# EAGLE board board (EAGLE 6.4)
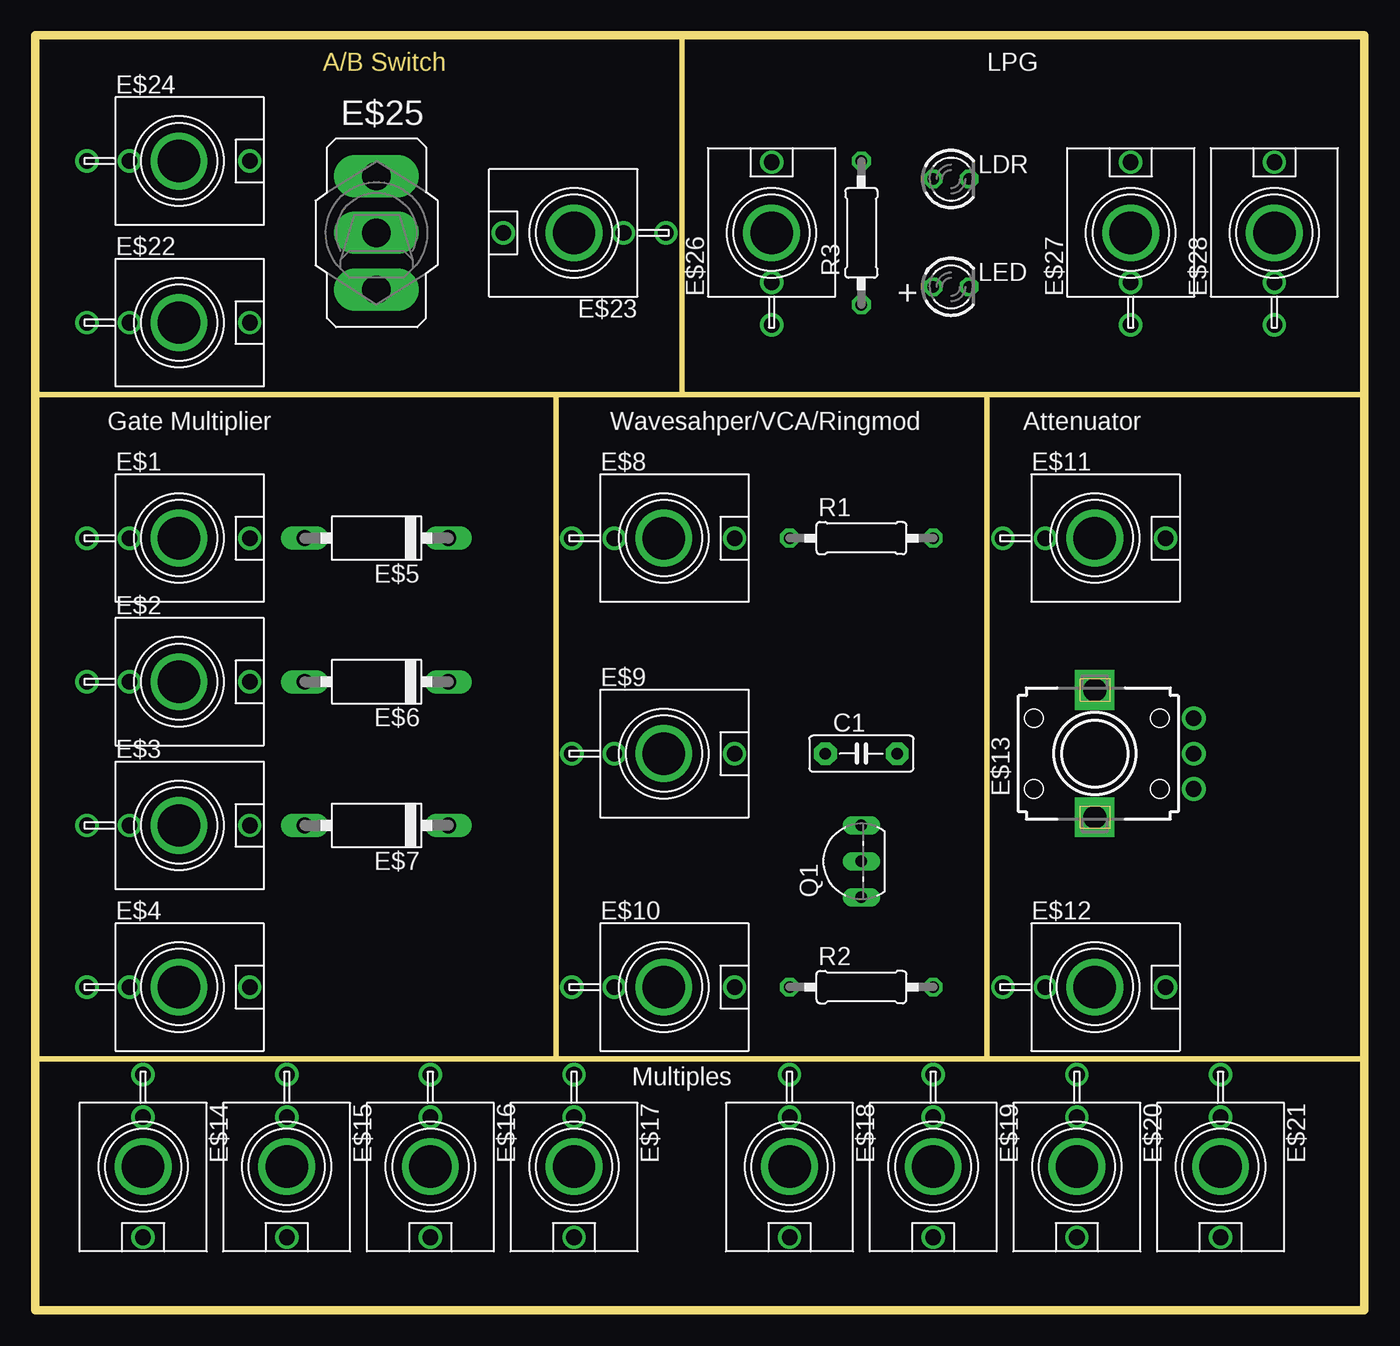
[diagram p0: board, top side]
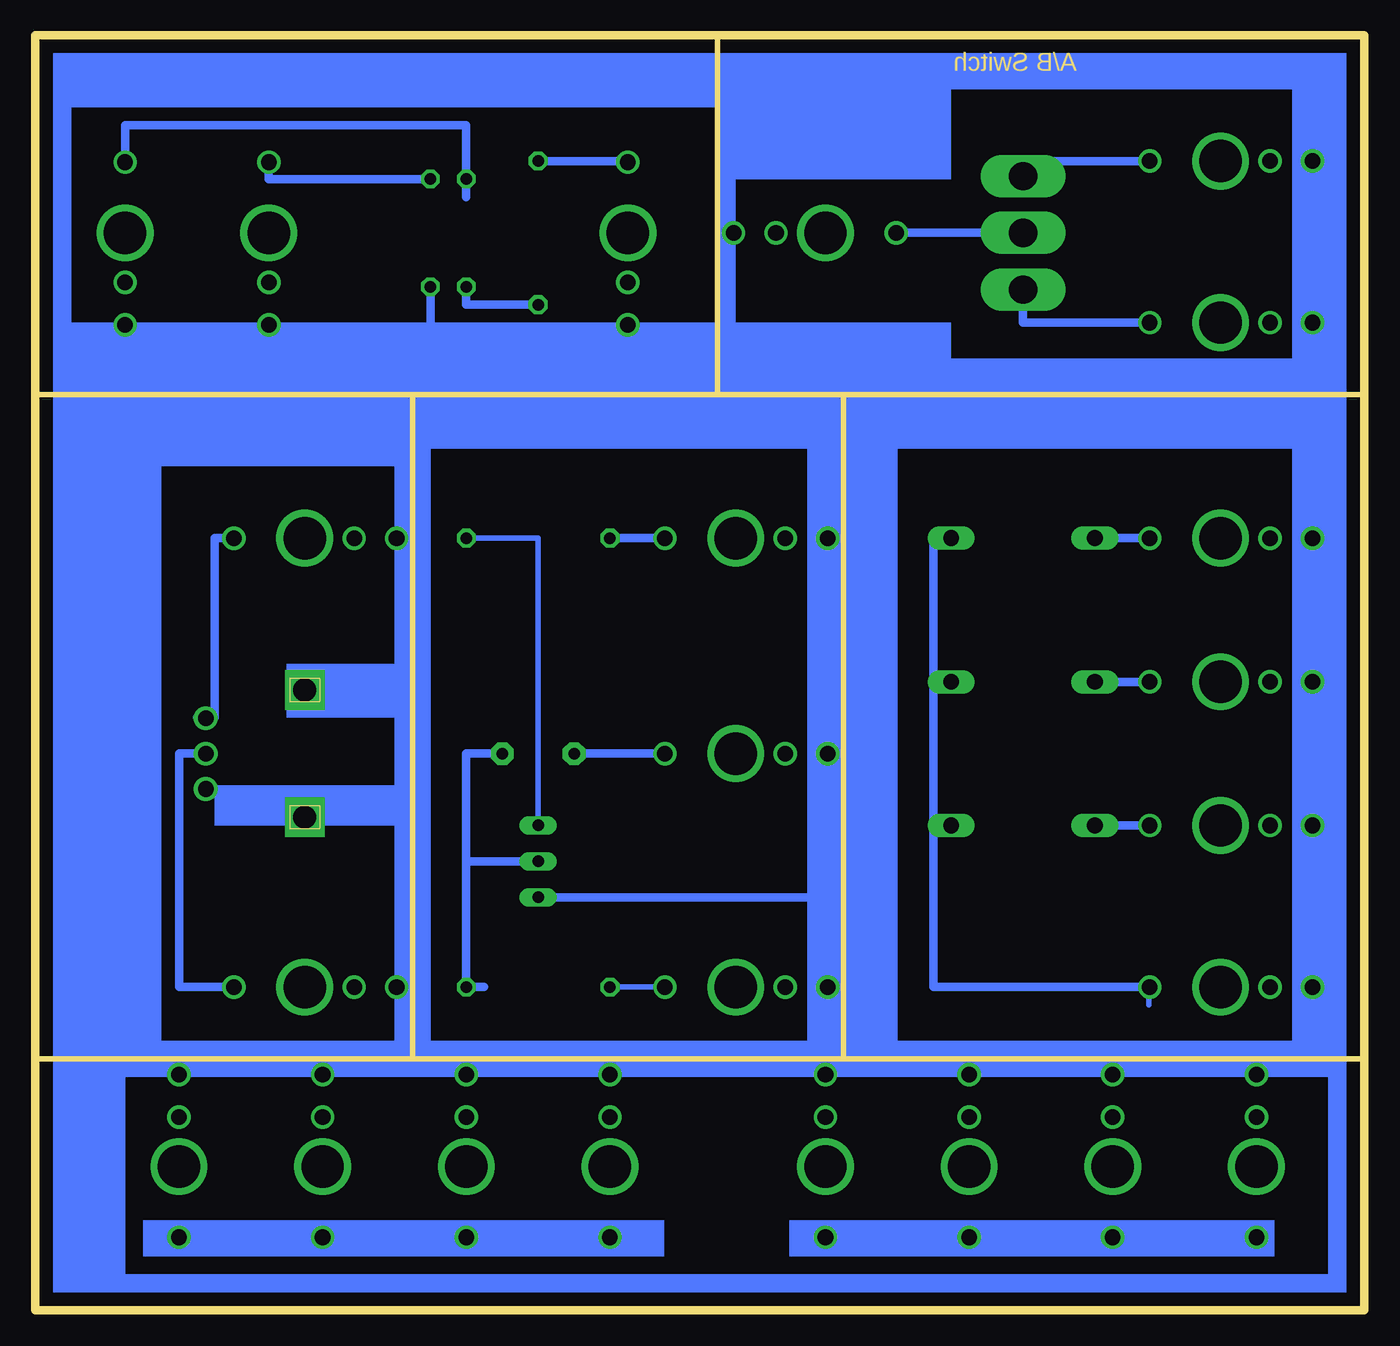
[diagram p1: board, bottom side, seen from below]

Size 93.98 x 90.17 mm. Coordinates in mm from the lower left corner, seen from the top.
Outline: 0,17.78 0,0 93.98,0 93.98,17.78
Outline: 0,17.78 0,64.77
Outline: 0,64.77 0,90.17 45.72,90.17
Outline: 45.72,90.17 93.98,90.17 93.98,64.77
Outline: 93.98,64.77 93.98,17.78
Outline: 0,64.77 36.83,64.77
Outline: 36.83,64.77 45.72,64.77
Outline: 67.31,64.77 45.72,64.77
Outline: 45.72,64.77 45.72,90.17
Outline: 36.83,64.77 36.83,17.78
Outline: 36.83,17.78 0,17.78
Outline: 36.83,17.78 67.31,17.78
Outline: 67.31,17.78 67.31,64.77
Outline: 67.31,64.77 93.98,64.77
Outline: 93.98,17.78 67.31,17.78
Copper layers (1*16): Top 0.035mm / dielectric 1.5mm / Bottom 0.035mm
Design rules "default": minimum track width 10mil, minimum drill 24mil, track to track 8mil, track to pad 8mil, pad to pad 8mil, via to via 8mil, smd to smd 8mil, copper to edge 40mil, drill to drill 8mil, minimum pad ring 10mil, minimum via ring 8mil, stop-mask expansion 4mil, vias tented up to drill 0mil, thermal gap 10mil

## Footprints (pad centres in the part's own frame; a part is rotated, then mirrored left to right if it is on the bottom)
C5B2.5 = drill 0.813 pad 1.6 octagon: 1 -2.54,0; 2 2.54,0
JACK-3.5 = drill 1.1: P$1 0,5; P$2 0,-3.5; P$3 0,-6.5 | drill 3: P$4 0,0
P1-10 = drill 1.118 long: A 5.08,0; C -5.08,0
EVUF = drill 1.1 pad 1.676: 1 -2.5,-7; 2 0,-7; 3 2.5,-7 | drill 1.6 pad 2.8 square: M1 4.5,0; M2 -4.5,0
320-916 = drill 2.007 long: 1 0,4.013; 2 0,0; 3 0,-4.013
LED3MM = drill 0.813 octagon: A -1.27,0; K 1.27,0
TO92-ECB = drill 0.813 long: B 2.54,0; C 0,0; E -2.54,0
0207/10 = drill 0.813 octagon: 1 -5.08,0; 2 5.08,0

## Placement (x,y rotation side)
C1  100nF  [C5B2.5]  58.42,39.37 0 top
E$1  [JACK-3.5]  10.16,54.61 270 top
E$2  [JACK-3.5]  10.16,44.45 270 top
E$3  [JACK-3.5]  10.16,34.29 270 top
E$4  [JACK-3.5]  10.16,22.86 270 top
E$5  [P1-10]  24.13,54.61 180 top
E$6  [P1-10]  24.13,44.45 180 top
E$7  [P1-10]  24.13,34.29 180 top
E$8  [JACK-3.5]  44.45,54.61 270 top
E$9  [JACK-3.5]  44.45,39.37 270 top
E$10  [JACK-3.5]  44.45,22.86 270 top
E$11  [JACK-3.5]  74.93,54.61 270 top
E$12  [JACK-3.5]  74.93,22.86 270 top
E$13  [EVUF]  74.93,39.37 90 top
E$14  [JACK-3.5]  7.62,10.16 180 top
E$15  [JACK-3.5]  17.78,10.16 180 top
E$16  [JACK-3.5]  27.94,10.16 180 top
E$17  [JACK-3.5]  38.1,10.16 180 top
E$18  [JACK-3.5]  53.34,10.16 180 top
E$19  [JACK-3.5]  63.5,10.16 180 top
E$20  [JACK-3.5]  73.66,10.16 180 top
E$21  [JACK-3.5]  83.82,10.16 180 top
E$22  [JACK-3.5]  10.16,69.85 270 top
E$23  [JACK-3.5]  38.1,76.2 90 top
E$24  [JACK-3.5]  10.16,81.28 270 top
E$25  [320-916]  24.13,76.2 0 top
E$26  [JACK-3.5]  52.07,76.2 0 top
E$27  [JACK-3.5]  77.47,76.2 0 top
E$28  [JACK-3.5]  87.63,76.2 0 top
LDR  [LED3MM]  64.77,80.01 0 top
LED  [LED3MM]  64.77,72.39 0 top
Q1  2N5457  [TO92-ECB]  58.42,31.75 90 top
R1  100K  [0207/10]  58.42,54.61 0 top
R2  100R  [0207/10]  58.42,22.86 0 top
R3  100K  [0207/10]  58.42,76.2 90 top

## Library data of the parts
C1 = capacitor-wima
E$1-E$4 E$8-E$12 E$14-E$24 E$26-E$28 = thonkiconn_eagle_v5 (2)
E$5-E$7 = diode
E$13 = pot
E$25 = switch
LDR LED = led
Q1 = transistor
R1-R3 = resistor

## Nets
LED: LED.K
S$1: E$5.A
S$2: E$6.A
S$3: E$7.A
S$6: R1.1
S$7: R2.1
S$8: Q1.B R1.2
S$9: C1.1
S$11: Q1.E
S$12: C1.2 Q1.C R2.2
S$19: R3.2
S$20: LED.A R3.1
S$21: LDR.K

## Tracks (layer width: path | path; a pad name or v marks a point on that pad's centre or on a via)
LED
  Bottom 0.61: LED.K 66.04,67.31
S$1
  Bottom 0.61: 15.24,54.61 E$5.A
S$2
  Bottom 0.406: E$6.A 17.78,44.45
  Bottom 0.61: 15.24,44.45 17.78,44.45
S$3
  Bottom 0.406: E$7.A 17.78,34.29
  Bottom 0.61: 15.24,34.29 17.78,34.29
S$4
  Bottom 0.406: 15.24,22.86 15.24,21.59
  Bottom 0.61: 30.48,54.61 30.48,22.86 15.24,22.86
S$5
  Bottom 0.406: 3.81,62.23 3.81,20.32
S$6
  Bottom 0.61: 49.53,54.61 R1.1
S$7
  Bottom 0.406: R2.1 49.53,22.86
S$8
  Bottom 0.406: R1.2 58.42,54.61 Q1.B
S$9
  Bottom 0.61: 49.53,39.37 C1.1
S$10
  Bottom 0.61: 80.01,54.61 81.28,54.61 81.28,41.91 82.55,41.91
S$11
  Bottom 0.406: 38.1,29.21 35.56,29.21
  Bottom 0.61: Q1.E 38.1,29.21
S$12
  Bottom 0.61: 62.23,22.86 R2.2 63.5,31.75 | C1.2 63.5,39.37 63.5,31.75 | Q1.C 63.5,31.75
S$13
  Bottom 0.61: 82.55,39.37 83.82,39.37 83.82,22.86 80.01,22.86
S$14
  Bottom 0.61: 81.28,36.83 67.31,36.83
S$15
  Bottom 0.61: 73.66,44.45 68.58,44.45
S$16
  Bottom 0.61: 15.24,81.28 24.13,81.28
S$17
  Bottom 0.61: 15.24,69.85 24.13,69.85 24.13,71.12
S$18
  Bottom 0.61: 33.02,76.2 25.4,76.2
S$19
  Bottom 0.61: 52.07,81.28 R3.2
S$20
  Bottom 0.61: R3.1 63.5,71.12 LED.A
S$21
  Bottom 0.61: LDR.K 77.47,80.01 77.47,81.28
S$22
  Bottom 0.61: 87.63,81.28 87.63,83.82 63.5,83.82 63.5,78.74
(copper drawn outside any net)
  shapes: Bottom area x30

## Text on the board
Dimension: A/B Switch
tNames: LPG | + | Gate Multiplier | Wavesahper/VCA/Ringmod | Attenuator | Multiples